# Altium PCB NeuroMother_A.PcbDoc (part 2 of 3)
Units mil, origin at the board's own origin, x right, y up, seen from the top; angles counter-clockwise.
Board outline 11995 x 18500 mil, 2 copper layers (Top Layer, Bottom Layer); 186 components, 92 nets, 510 pads, 3972 vias.
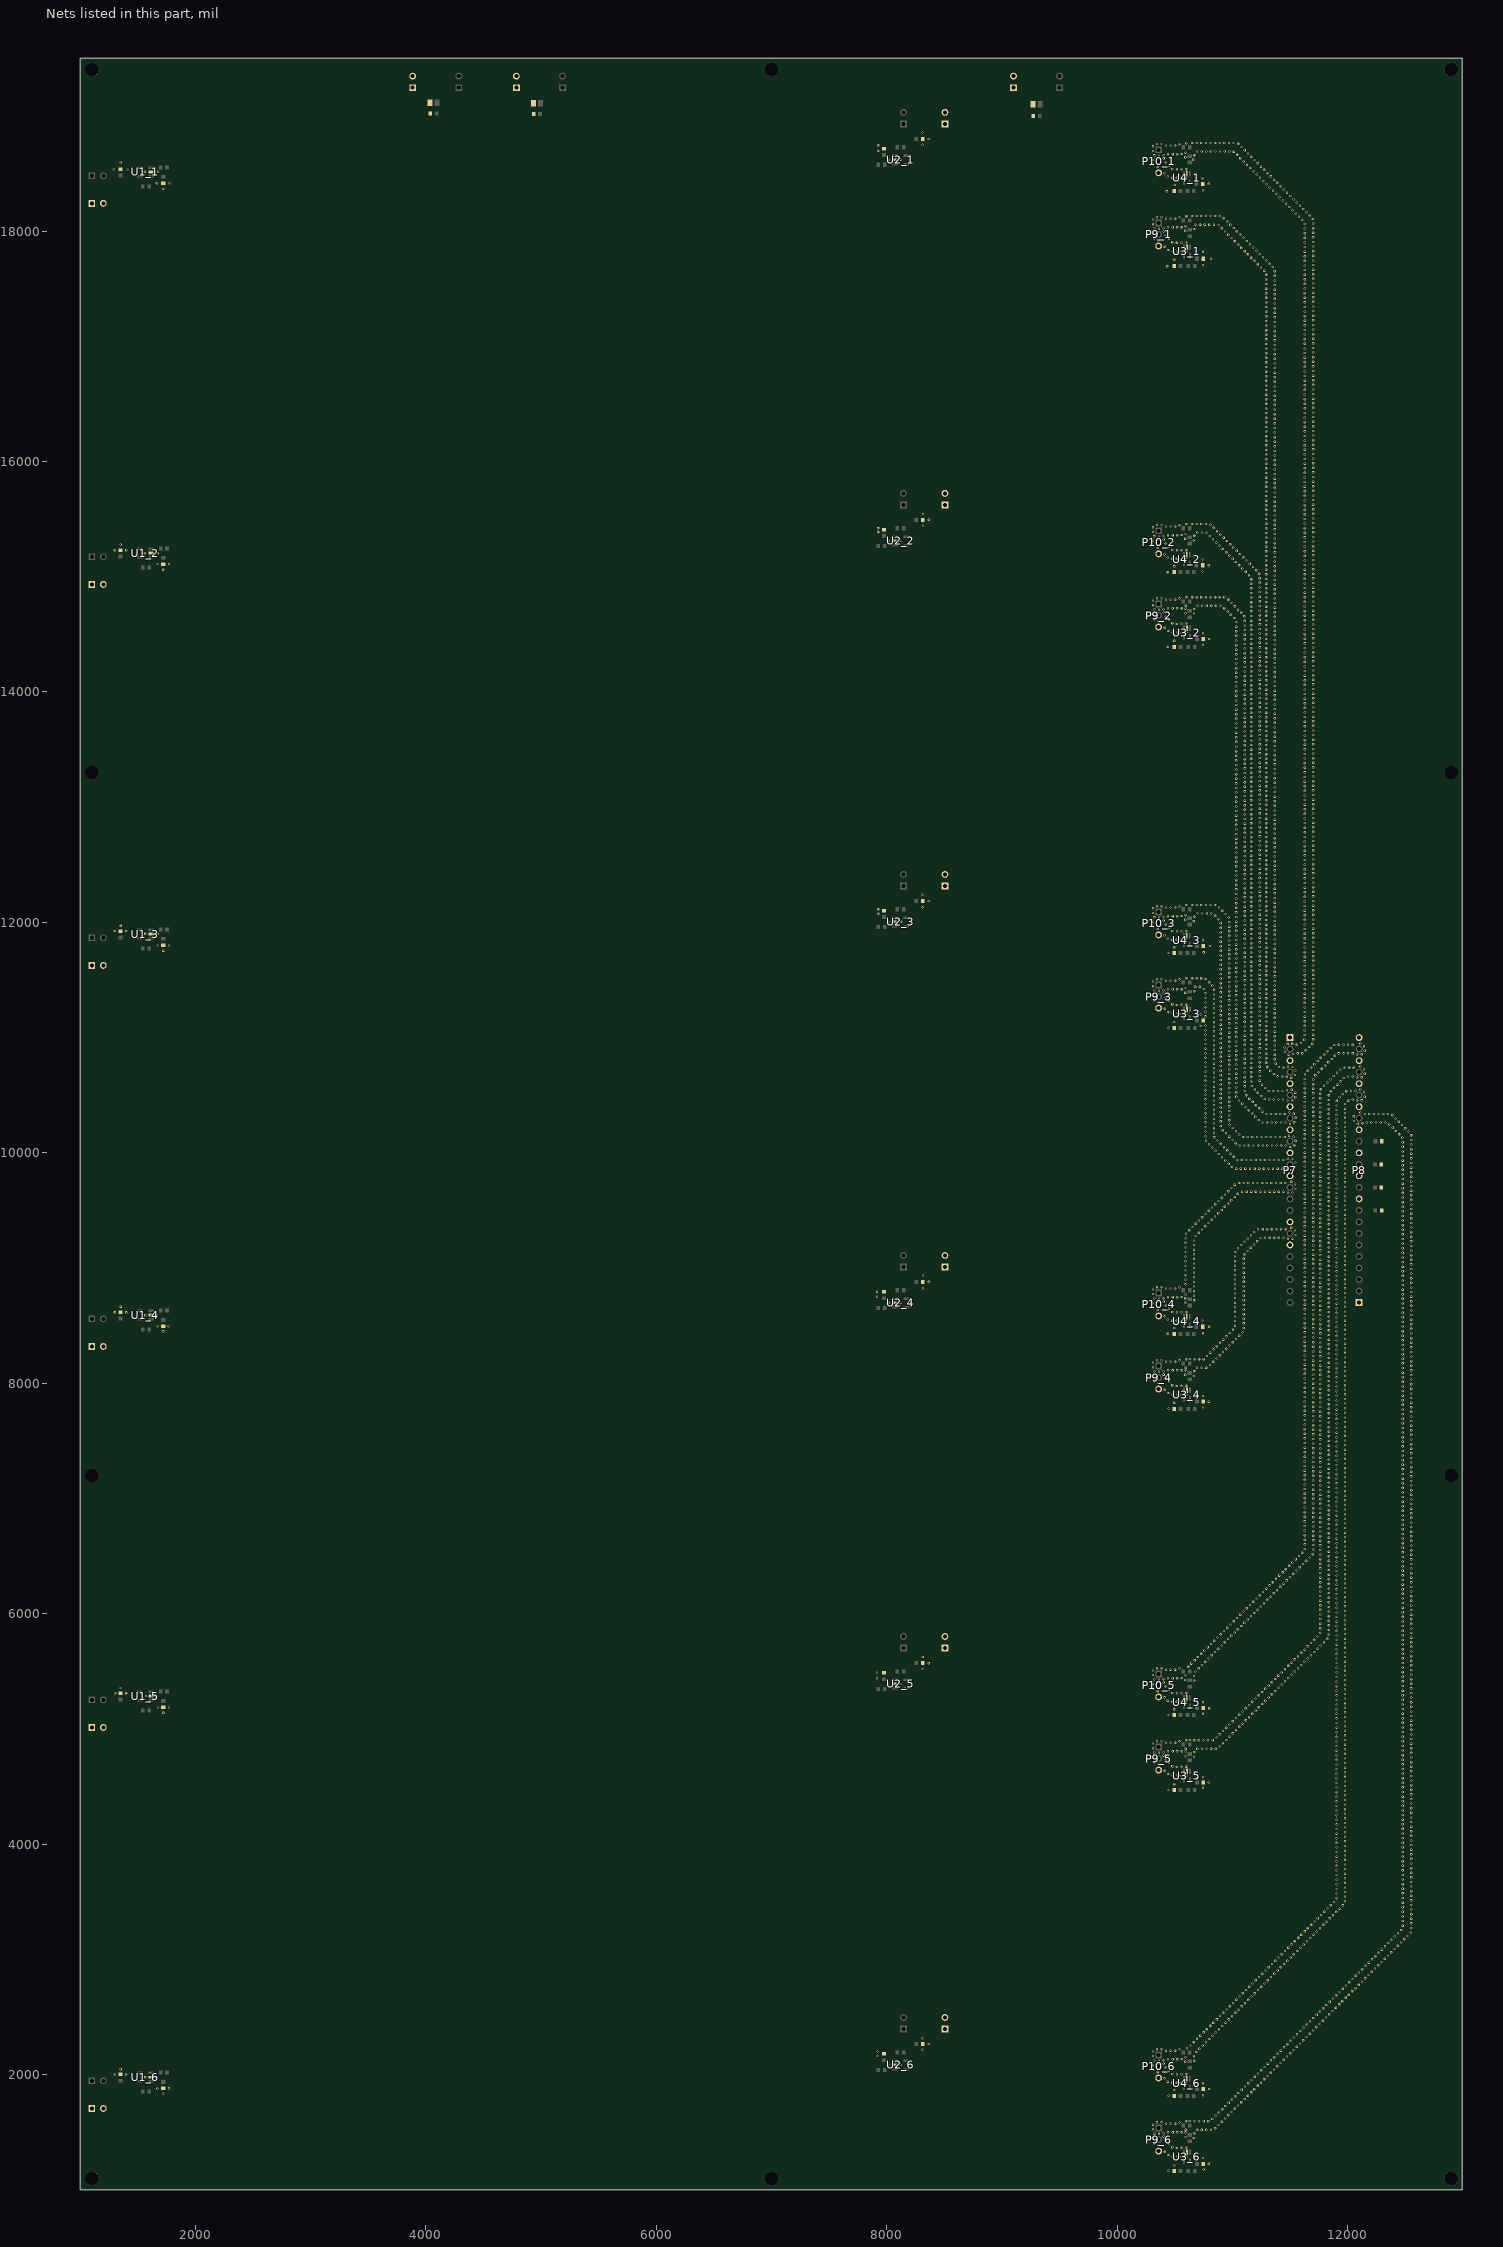
[diagram p2: the nets of this part, all layers, seen from the top]

## Via types
v1: diameter 20, hole 10, Top Layer to Bottom Layer, tented both sides, 3972 vias

## Nets (pads, with @x,y where several pads share a name; then routed paths per layer and width w, separated by ;. In a path a pad name is that pad's centre, name@x,y a point inside that pad or via, vN(x,y) a via of type N, cw(c..) or ccw(c..) an arc to the next point about the centre after c; other vN are vias at no path point) (continued)
GND: (continued)
  other v1: 10445,1165 10750,1175 10495,1210 10795,1225 10745,1275 10559.7,1286.56 10599.69,1286.94 10479.71,1287.78 10519.71,1287.78 10441.81,1300.56 10413.53,1328.84 10518.08,1362.22 10558.07,1363.07 10598.03,1364.88 10478.66,1368.97 10356.64,1385.09 10450.37,1397.26 10321.18,1403.59 10422.09,1425.54 10310.59,1442.17 10665.28,1449.66 10592.15,1458.06 10402.82,1460.59 10362.15,1485.08 10322.19,1486.95 10401.88,1489.67 10668.11,1489.56 10441.05,1497.78 10481.05,1497.78 10521.05,1497.78 10592.78,1498.05 10561.03,1499.03 10594.91,1520.3 10693.65,1520.34 10733.65,1520.34 10773.65,1520.34 10813.65,1520.34 10310.08,1525.07 10851.35,1533.72 10879.63,1562 10310.19,1565.07 10422.85,1572.22 10462.85,1572.22 10502.85,1572.22 10541.02,1584.17 10344.92,1584.92 10384.92,1584.92 10907.92,1590.29 10598.43,1594.12 10670.29,1594.77 10710.29,1594.77 10750.29,1594.77 10790.29,1594.77 10630.3,1595.67 10825.72,1613.35 10936.2,1618.57 10854,1641.63 10964.48,1646.85 10882.29,1669.92 10992.77,1675.14 10910.57,1698.2 11021.05,1703.42 10938.85,1726.49 11049.34,1731.71 10967.14,1754.77 11077.62,1759.99 10995.42,1783.05 11105.91,1788.28 11023.71,1811.34 10445,1815 11134.19,1816.56 10745,1820 1720,1835 11051.99,1839.62 11162.47,1844.84 10495,1865 11080.28,1867.91 11190.76,1873.13 10800,1875 1668.81,1877.99 1770,1880 11108.56,1896.19 11219.04,1901.41 10597.91,1923.94 11136.84,1924.48 10557.93,1925.14 10745,1925 10478.02,1927.78 10518.02,1927.78 11247.33,1929.7 10439.4,1938.21 11165.13,1952.76 11275.61,1957.98 10411,1966.37 1565,1975 1665,1975 11193.41,1981.04 11303.9,1986.27 1300,2000 1400,2000 10518.62,2002.22 10558.62,2002.22 10598.62,2001.89 10478.66,2003.97 11221.7,2009.33 11332.18,2014.55 10352.32,2020.66 10450.37,2032.26 11249.98,2037.61 10318.52,2042.06 11360.46,2042.83 1350,2045 10422.09,2060.54 11278.27,2065.9 11388.75,2071.12 10311.37,2081.41 8015,2085 8120,2085 11306.55,2094.18 10402.82,2095.59 11417.03,2099.4 10591.89,2110.21 10362.15,2120.08 10668.11,2119.76 10322.19,2121.95 11334.83,2122.47 10401.88,2124.67 11445.32,2127.69 10441.05,2132.78 10481.05,2132.78 10521.05,2132.78 10561.03,2134.03 10592.78,2150.2 11363.12,2150.75 11473.6,2155.97 7920,2160 10310.08,2160.07 10667.22,2159.75 11391.4,2179.03 11501.89,2184.26 10685.13,2195.52 7920,2200 10310.19,2200.07 10422.85,2207.22 10462.85,2207.22 10502.85,2207.22 11419.69,2207.32 11530.17,2212.54 8310,2215 10541.02,2219.17 10344.92,2219.92 10384.92,2219.92 10713.41,2223.8 10605.14,2228.24 11447.97,2235.6 11558.45,2240.82 10741.69,2252.09 10636.9,2252.56 11476.26,2263.89 8365,2265 11586.74,2269.11 10769.98,2280.37 10665.19,2280.84 11504.54,2292.17 11615.02,2297.39 10693.47,2309.13 10798.26,2308.66 8310,2315 11532.82,2320.45 11643.31,2325.68 10721.76,2337.41 10826.55,2336.94 11561.11,2348.74 11671.59,2353.96 10854.83,2365.23 10750.04,2365.7 11589.39,2377.02 11699.88,2382.25 10778.33,2393.98 10883.12,2393.51 11617.68,2405.31 11728.16,2410.53 10806.61,2422.26 10911.4,2421.79 11645.96,2433.59 11756.44,2438.81 10939.68,2450.08 10834.89,2450.55 11674.25,2461.88 11784.73,2467.1 10967.97,2478.36 10863.18,2478.83 11702.53,2490.16 11813.01,2495.38 10891.46,2507.12 10996.25,2506.65 11730.81,2518.44 11841.3,2523.67 10919.75,2535.4 11024.54,2534.93 11759.1,2546.73 11869.58,2551.95 11052.82,2563.22 10948.03,2563.68 11787.38,2575.01 11897.87,2580.24 11081.11,2591.5 10976.32,2591.97 11815.67,2603.3 11926.15,2608.52 11004.6,2620.25 11109.39,2619.78 11843.95,2631.58 11954.43,2636.8 11137.67,2648.07 11032.88,2648.54 11872.24,2659.87 11982.72,2665.09 11165.96,2676.35 11061.17,2676.82 11900.52,2688.15 12011,2693.37 11089.45,2705.11 11194.24,2704.64 11928.8,2716.43 12039.29,2721.66 11117.74,2733.39 11222.53,2732.92 11957.09,2744.72 12067.57,2749.94 11250.81,2761.21 11146.02,2761.67 11985.37,2773 12095.86,2778.23 11279.1,2789.49 11174.31,2789.96 12013.66,2801.29 12124.14,2806.51 11202.59,2818.24 11307.38,2817.77 12041.94,2829.57 12152.42,2834.79 11335.66,2846.06 11230.87,2846.53 12070.23,2857.86 12180.71,2863.08 11363.95,2874.34 11259.16,2874.81 12098.51,2886.14 12208.99,2891.36 11287.44,2903.1 11392.23,2902.63 12126.79,2914.42 12237.28,2919.65 11315.73,2931.38 11420.52,2930.91 12155.08,2942.71 12265.56,2947.93 11448.8,2959.2 11344.01,2959.66 12183.36,2970.99 12293.85,2976.22 11477.09,2987.48 11372.3,2987.95 12211.65,2999.28 12322.13,3004.5 11400.58,3016.23 11505.37,3015.76 12239.93,3027.56 12350.41,3032.78 11533.65,3044.05 11428.86,3044.52 12268.22,3055.85 12378.7,3061.07 11561.94,3072.33 11457.15,3072.8 12296.5,3084.13 12406.98,3089.35 11485.43,3101.09 11590.22,3100.62 12324.78,3112.41 12435.27,3117.64 11513.72,3129.37 11618.51,3128.9 12353.07,3140.7 12463.55,3145.92 11646.79,3157.18 11542,3157.65 12381.35,3168.98 12491.84,3174.2 11675.08,3185.47 11570.29,3185.94 12409.64,3197.27 12520.12,3202.49 11598.57,3214.22 11703.36,3213.75 12437.92,3225.55 12547.26,3231.87 11731.64,3242.04 11626.85,3242.51 12466.21,3253.84 11759.93,3270.32 11655.14,3270.79 12552.22,3271.57 12477.78,3292.12 11683.42,3299.08 11788.21,3298.61 12552.22,3311.57 11711.71,3327.36 11816.5,3326.89 12477.78,3332.12 12552.22,3351.57 11844.78,3355.17 11739.99,3355.64 12477.78,3372.12 11873.07,3383.46 11768.28,3383.93 12552.22,3391.57 11796.56,3412.21 11901.35,3411.74 12477.78,3412.12 12552.22,3431.57 11824.84,3440.5 11929.63,3440.03 12477.78,3452.12 11957.92,3468.31 11853.13,3468.78 12552.22,3471.57 12477.78,3492.12 11881.41,3497.07 11977.22,3503.35 12552.22,3511.57 11902.78,3530.88 12477.78,3532.12 11977.22,3543.35 12552.22,3551.57 11902.78,3570.88 12477.78,3572.12 11977.22,3583.35 12552.22,3591.57 11902.78,3610.88 12477.78,3612.12 11977.22,3623.35 12552.22,3631.57 11902.78,3650.88 12477.78,3652.12 11977.22,3663.35 12552.22,3671.57 11902.78,3690.88 12477.78,3692.12 11977.22,3703.35 12552.22,3711.57 11902.78,3730.88 12477.78,3732.12 11977.22,3743.35 12552.22,3751.57 11902.78,3770.88 12477.78,3772.12 11977.22,3783.35 12552.22,3791.57 11902.78,3810.88 12477.78,3812.12 11977.22,3823.35 12552.22,3831.57 11902.78,3850.88 12477.78,3852.12 11977.22,3863.35 12552.22,3871.57 11902.78,3890.88 12477.78,3892.12 11977.22,3903.35 12552.22,3911.57 11902.78,3930.88 12477.78,3932.12 11977.22,3943.35 12552.22,3951.57 11902.78,3970.88 12477.78,3972.12 11977.22,3983.35 12552.22,3991.57 11902.78,4010.88 12477.78,4012.12 11977.22,4023.35 12552.22,4031.57 11902.78,4050.88 12477.78,4052.12 11977.22,4063.35 12552.22,4071.57 11902.78,4090.88 12477.78,4092.12 11977.22,4103.35 12552.22,4111.57 11902.78,4130.88 12477.78,4132.12 11977.22,4143.35 12552.22,4151.57 11902.78,4170.88 12477.78,4172.12 11977.22,4183.35 12552.22,4191.57 11902.78,4210.88 12477.78,4212.12 11977.22,4223.35 12552.22,4231.57 11902.78,4250.88 12477.78,4252.12 11977.22,4263.35 12552.22,4271.57 11902.78,4290.88 12477.78,4292.12 11977.22,4303.35 12552.22,4311.57 11902.78,4330.88 12477.78,4332.12 11977.22,4343.35 12552.22,4351.57 11902.78,4370.88 12477.78,4372.12 11977.22,4383.35 12552.22,4391.57 11902.78,4410.88 12477.78,4412.12 11977.22,4423.35 12552.22,4431.57 11902.78,4450.88 12477.78,4452.12 11977.22,4463.35 10445,4470 12552.22,4471.57 10745,4490 11902.78,4490.88 12477.78,4492.12 11977.22,4503.35 12552.22,4511.57 10495,4520 11902.78,4530.88 12477.78,4532.12 10795,4535 11977.22,4543.35 12552.22,4551.57 11902.78,4570.88 12477.78,4572.12 10745,4580 11977.22,4583.35 12552.22,4591.57 10559.7,4593.66 10599.69,4594.04 10479.71,4594.88 10519.71,4594.88 10441.81,4607.66 11902.78,4610.88 12477.78,4612.12 11977.22,4623.35 12552.22,4631.57 10413.53,4635.94 11902.78,4650.88 12477.78,4652.12 11977.22,4663.35 10518.08,4669.32 10558.07,4670.17 10598.03,4671.98 12552.22,4671.57 10478.66,4676.07 11902.78,4690.88 10356.64,4692.19 12477.78,4692.12 11977.22,4703.35 10450.37,4704.36 10321.18,4710.69 12552.22,4711.57 11902.78,4730.88 12477.78,4732.12 10422.09,4732.64 11977.22,4743.35 10310.59,4749.27 12552.22,4751.57 10666.42,4758.46 10592.62,4762.83 10402.82,4767.69 11902.78,4770.88 12477.78,4772.12 11977.22,4783.35 10362.15,4792.18 12552.22,4791.57 10322.19,4794.05 10401.88,4796.77 10668.02,4798.43 10592.78,4802.83 10441.05,4804.88 10481.05,4804.88 10521.05,4804.88 10561.03,4806.13 11902.78,4810.88 12477.78,4812.12 11977.22,4823.35 10594.91,4827.4 10695.55,4827.44 10735.55,4827.44 10775.55,4827.44 10815.55,4827.44 10855.55,4827.62 10310.08,4832.17 12552.22,4831.57 10890.21,4847.58 11902.78,4850.88 12477.78,4852.12 11977.22,4863.35 10310.19,4872.17 12552.22,4871.57 10918.5,4875.87 10422.85,4879.32 10462.85,4879.32 10502.85,4879.32 10541.02,4891.27 11902.78,4890.88 10344.92,4892.02 10384.92,4892.02 12477.78,4892.12 10598.43,4901.22 10668.61,4901.87 10708.61,4901.87 10748.61,4901.87 10788.61,4901.87 10828.61,4901.87 10628.62,4902.77 11977.22,4903.35 10946.78,4904.15 12552.22,4911.57 10861.71,4924.34 11902.78,4930.88 10975.07,4932.44 12477.78,4932.12 11977.22,4943.35 12552.22,4951.57 10889.99,4952.62 11003.35,4960.72 11902.78,4970.88 12477.78,4972.12 10918.27,4980.9 11977.22,4983.35 11031.64,4989 12552.22,4991.57 10946.56,5009.19 11902.78,5010.88 12477.78,5012.12 11059.92,5017.29 11977.22,5023.35 12552.22,5031.57 10974.84,5037.47 11088.2,5045.57 11902.78,5050.88 12477.78,5052.12 11977.22,5063.35 11003.13,5065.76 12552.22,5071.57 11116.49,5073.86 11902.78,5090.88 12477.78,5092.12 11031.41,5094.04 11144.77,5102.14 11977.22,5103.35 12552.22,5111.57 10445,5120 11059.69,5122.33 10745,5130 11173.06,5130.43 11902.78,5130.88 12477.78,5132.12 1720,5140 11977.22,5143.35 11087.98,5150.61 12552.22,5151.57 11201.34,5158.71 10495,5170 11902.78,5170.88 12477.78,5172.12 11116.26,5178.89 10800,5180 11977.22,5183.35 1675,5185 1770,5185 11229.62,5186.99 12552.22,5191.57 11144.55,5207.18 11902.78,5210.88 12477.78,5212.12 11257.91,5215.28 11977.22,5223.35 10745,5230 10597.91,5231.04 10557.93,5232.24 12552.22,5231.57 10478.02,5234.88 10518.02,5234.88 11172.83,5235.46 11286.19,5243.56 10439.4,5245.31 11902.78,5250.88 12477.78,5252.12 11977.22,5263.35 11201.12,5263.75 11314.48,5271.85 12552.22,5271.57 10411,5273.47 1570,5285 1665,5285 11902.78,5290.88 11229.4,5292.03 12477.78,5292.12 11342.76,5300.13 11977.22,5303.35 10518.62,5309.32 10558.62,5309.32 10598.62,5308.99 1305,5310 1400,5310 10478.66,5311.07 12552.22,5311.57 11257.68,5320.31 10352.32,5327.76 11371.05,5328.42 11902.78,5330.88 12477.78,5332.12 10450.37,5339.36 11977.22,5343.35 10318.52,5349.16 11285.97,5348.6 12552.22,5351.57 1348.31,5355.17 11399.33,5356.7 10422.09,5367.64 11902.78,5370.88 12477.78,5372.12 11314.25,5376.88 11977.22,5383.35 11427.61,5384.98 10311.37,5388.51 8015,5390 8120,5390 12552.22,5391.57 10402.82,5402.69 11342.54,5405.17 11902.78,5410.88 12477.78,5412.12 11455.9,5413.27 10668.11,5419.23 11977.22,5423.35 10591.89,5424.9 10362.15,5427.18 10322.19,5429.05 10401.88,5431.77 12552.22,5431.57 11370.82,5433.45 7915,5440 10441.05,5439.88 10481.05,5439.88 10521.05,5439.88 10561.03,5441.13 11484.18,5441.55 11902.78,5450.88 12477.78,5452.12 10667.22,5459.22 11399.11,5461.74 11977.22,5463.35 10592.78,5464.89 10310.08,5467.17 11512.47,5469.84 12552.22,5471.57 7915,5490 11427.39,5490.02 11902.78,5490.88 12477.78,5492.12 10679.72,5497.21 11540.75,5498.12 11977.22,5503.35 10310.19,5507.17 12552.22,5511.57 10422.85,5514.32 10462.85,5514.32 10502.85,5514.32 11455.67,5518.3 8310,5520 10708.01,5525.5 10541.02,5526.27 11569.04,5526.41 10344.92,5527.02 10384.92,5527.02 11902.78,5530.88 12477.78,5532.12 10615.46,5538.21 11977.22,5543.35 11483.96,5546.59 12552.22,5551.57 10736.29,5553.78 11597.32,5554.69 10643.74,5566.5 8365,5570 11902.78,5570.88 12477.78,5572.12 11512.24,5574.87 10764.57,5582.07 11625.6,5582.97 11977.22,5583.35 12552.22,5591.57 10672.03,5594.78 11540.53,5603.16 10792.86,5610.35 11653.89,5611.26 11902.78,5610.88 12477.78,5612.12 10700.31,5623.06 11977.22,5623.35 8311.55,5623.96 11568.81,5631.44 12552.22,5631.57 10821.14,5638.64 11682.17,5639.54 10728.6,5651.35 11902.78,5650.88 12477.78,5652.12 11597.1,5659.73 11977.22,5663.35 10849.43,5666.92 11710.46,5667.83 12552.22,5671.57 10756.88,5679.63 11625.38,5688.01 11902.78,5690.88 12477.78,5692.12 10877.71,5695.2 11738.74,5696.11 11977.22,5703.35 10785.16,5707.92 12552.22,5711.57 11653.66,5716.29 10906,5723.49 11767.03,5724.4 11902.78,5730.88 12477.78,5732.12 10813.45,5736.2 11977.22,5743.35 11681.95,5744.58 10934.28,5751.77 12552.22,5751.57 11795.31,5752.68 10841.73,5764.49 11902.78,5770.88 12477.78,5772.12 11710.23,5772.86 10962.56,5780.06 11823.59,5780.96 11977.22,5783.35 12552.22,5791.57 10870.02,5792.77 11738.52,5801.15 10990.85,5808.34 11902.78,5810.88 12477.78,5812.12 11837.22,5818.57 10898.3,5821.05 11977.22,5823.35 12552.22,5831.57 11762.78,5832.95 11019.13,5836.63 10926.59,5849.34 11902.78,5850.88 12477.78,5852.12 11837.22,5858.57 11977.22,5863.35 11047.42,5864.91 12552.22,5871.57 11762.78,5872.95 10954.87,5877.62 11902.78,5890.88 12477.78,5892.12 11075.7,5893.19 11837.22,5898.57 11977.22,5903.35 10983.15,5905.91 12552.22,5911.57 11762.78,5912.95 11103.99,5921.48 11902.78,5930.88 12477.78,5932.12 11011.44,5934.19 11837.22,5938.57 11977.22,5943.35 11132.27,5949.76 12552.22,5951.57 11762.78,5952.95 11039.72,5962.48 11902.78,5970.88 12477.78,5972.12 11160.55,5978.05 11837.22,5978.57 11977.22,5983.35 11068.01,5990.76 12552.22,5991.57 11762.78,5992.95 11188.84,6006.33 11902.78,6010.88 12477.78,6012.12 11096.29,6019.04 11837.22,6018.57 11977.22,6023.35 12552.22,6031.57 11762.78,6032.95 11217.12,6034.62 11124.58,6047.33 11902.78,6050.88 12477.78,6052.12 11837.22,6058.57 11245.41,6062.9 11977.22,6063.35 12552.22,6071.57 11762.78,6072.95 11152.86,6075.61 11273.69,6091.18 11902.78,6090.88 12477.78,6092.12 11837.22,6098.57 11977.22,6103.35 11181.14,6103.9 12552.22,6111.57 11762.78,6112.95 11301.98,6119.47 11902.78,6130.88 11209.43,6132.18 12477.78,6132.12 11837.22,6138.57 11977.22,6143.35 11330.26,6147.75 12552.22,6151.57 11762.78,6152.95 11237.71,6160.47 11902.78,6170.88 12477.78,6172.12 11358.54,6176.04 11837.22,6178.57 11977.22,6183.35 11266,6188.75 12552.22,6191.57 11762.78,6192.95 11386.83,6204.32 11902.78,6210.88 12477.78,6212.12 11294.28,6217.03 11837.22,6218.57 11977.22,6223.35 12552.22,6231.57 11415.11,6232.61 11762.78,6232.95 11322.56,6245.32 11902.78,6250.88 12477.78,6252.12 11837.22,6258.57 11443.4,6260.89 11977.22,6263.35 12552.22,6271.57 11762.78,6272.95 11350.85,6273.6 11471.68,6289.17 11902.78,6290.88 12477.78,6292.12 11837.22,6298.57 11379.13,6301.89 11977.22,6303.35 12552.22,6311.57 11762.78,6312.95 11499.97,6317.46 11407.42,6330.17 11902.78,6330.88 12477.78,6332.12 11837.22,6338.57 11977.22,6343.35 11528.25,6345.74 12552.22,6351.57 11762.78,6352.95 11435.7,6358.46 11902.78,6370.88 12477.78,6372.12 11556.53,6374.03 11837.22,6378.57 11977.22,6383.35 11463.99,6386.74 12552.22,6391.57 11762.78,6392.95 11584.82,6402.31 11902.78,6410.88 12477.78,6412.12 11492.27,6415.02 11837.22,6418.57 11977.22,6423.35 11613.1,6430.6 12552.22,6431.57 11762.78,6432.95 11520.55,6443.31 11902.78,6450.88 12477.78,6452.12 11641.39,6458.88 11837.22,6458.57 11977.22,6463.35 11548.84,6471.59 12552.22,6471.57 11762.78,6472.95 11669.67,6487.16 11902.78,6490.88 12477.78,6492.12 11837.22,6498.57 11577.12,6499.88 11977.22,6503.35 12552.22,6511.57 11762.78,6512.95 11696.9,6516.46 11605.41,6528.16 11902.78,6530.88 12477.78,6532.12 11837.22,6538.57 11977.22,6543.35 12552.22,6551.57 11762.78,6552.95 11702.22,6556.11 11627.78,6561.32 11902.78,6570.88 12477.78,6572.12 11837.22,6578.57 11977.22,6583.35 12552.22,6591.57 11762.78,6592.95 11702.22,6596.11 11627.78,6601.32 11902.78,6610.88 12477.78,6612.12 11837.22,6618.57 11977.22,6623.35 12552.22,6631.57 11762.78,6632.95 11702.22,6636.11 11627.78,6641.32 11902.78,6650.88 12477.78,6652.12 11837.22,6658.57 11977.22,6663.35 12552.22,6671.57 11762.78,6672.95 11702.22,6676.11 11627.78,6681.32 11902.78,6690.88 12477.78,6692.12 11837.22,6698.57 11977.22,6703.35 12552.22,6711.57 11762.78,6712.95 11702.22,6716.11 11627.78,6721.32 11902.78,6730.88 12477.78,6732.12 11837.22,6738.57 11977.22,6743.35 12552.22,6751.57 11762.78,6752.95 11702.22,6756.11 11627.78,6761.32 11902.78,6770.88 12477.78,6772.12 11837.22,6778.57 11977.22,6783.35 12552.22,6791.57 11762.78,6792.95 11702.22,6796.11 11627.78,6801.32 11902.78,6810.88 12477.78,6812.12 11837.22,6818.57 11977.22,6823.35 12552.22,6831.57 11762.78,6832.95 11702.22,6836.11 11627.78,6841.32 11902.78,6850.88 12477.78,6852.12 11837.22,6858.57 11977.22,6863.35 12552.22,6871.57 11762.78,6872.95 11702.22,6876.11 11627.78,6881.32 11902.78,6890.88 12477.78,6892.12 11837.22,6898.57 11977.22,6903.35 12552.22,6911.57 11762.78,6912.95 11702.22,6916.11 11627.78,6921.32 11902.78,6930.88 12477.78,6932.12 11837.22,6938.57 11977.22,6943.35 12552.22,6951.57 11762.78,6952.95 11702.22,6956.11 11627.78,6961.32 11902.78,6970.88 12477.78,6972.12 11837.22,6978.57 11977.22,6983.35 12552.22,6991.57 11762.78,6992.95 11702.22,6996.11 11627.78,7001.32 11902.78,7010.88 12477.78,7012.12 11837.22,7018.57 11977.22,7023.35 12552.22,7031.57 11762.78,7032.95 11702.22,7036.11 11627.78,7041.32 11902.78,7050.88 12477.78,7052.12 11837.22,7058.57 11977.22,7063.35 12552.22,7071.57 11762.78,7072.95 11702.22,7076.11 11627.78,7081.32 11902.78,7090.88 12477.78,7092.12 11837.22,7098.57 11977.22,7103.35 12552.22,7111.57 11762.78,7112.95 11702.22,7116.11 11627.78,7121.32 11902.78,7130.88 12477.78,7132.12 11837.22,7138.57 11977.22,7143.35 12552.22,7151.57 11762.78,7152.95 11702.22,7156.11 11627.78,7161.32 11902.78,7170.88 12477.78,7172.12 11837.22,7178.57 11977.22,7183.35 12552.22,7191.57 11762.78,7192.95 11702.22,7196.11 11627.78,7201.32 11902.78,7210.88 12477.78,7212.12 11837.22,7218.57 11977.22,7223.35 12552.22,7231.57 11762.78,7232.95 11702.22,7236.11 11627.78,7241.32 11902.78,7250.88 12477.78,7252.12 11837.22,7258.57 11977.22,7263.35 12552.22,7271.57 11762.78,7272.95 11702.22,7276.11 11627.78,7281.32 11902.78,7290.88 12477.78,7292.12 11837.22,7298.57 11977.22,7303.35 12552.22,7311.57 11762.78,7312.95 11702.22,7316.11 11627.78,7321.32 11902.78,7330.88 12477.78,7332.12 11837.22,7338.57 11977.22,7343.35 12552.22,7351.57 11762.78,7352.95 11702.22,7356.11 11627.78,7361.32 11902.78,7370.88 12477.78,7372.12 11837.22,7378.57 11977.22,7383.35 12552.22,7391.57 11762.78,7392.95 11702.22,7396.11 11627.78,7401.32 11902.78,7410.88 12477.78,7412.12 11837.22,7418.57 11977.22,7423.35 12552.22,7431.57 11762.78,7432.95 11702.22,7436.11 11627.78,7441.32 11902.78,7450.88 12477.78,7452.12 11837.22,7458.57 11977.22,7463.35 12552.22,7471.57 11762.78,7472.95 11702.22,7476.11 11627.78,7481.32 11902.78,7490.88 12477.78,7492.12 11837.22,7498.57 11977.22,7503.35 12552.22,7511.57 11762.78,7512.95 11702.22,7516.11 11627.78,7521.32 11902.78,7530.88 12477.78,7532.12 11837.22,7538.57 11977.22,7543.35 12552.22,7551.57 11762.78,7552.95 11702.22,7556.11 11627.78,7561.32 11902.78,7570.88 12477.78,7572.12 11837.22,7578.57 11977.22,7583.35 12552.22,7591.57 11762.78,7592.95 11702.22,7596.11 11627.78,7601.32 11902.78,7610.88 12477.78,7612.12 11837.22,7618.57 11977.22,7623.35 12552.22,7631.57 11762.78,7632.95 11702.22,7636.11 11627.78,7641.32 11902.78,7650.88 12477.78,7652.12 11837.22,7658.57 11977.22,7663.35 12552.22,7671.57 11762.78,7672.95 11702.22,7676.11 11627.78,7681.32 11902.78,7690.88 12477.78,7692.12 11837.22,7698.57 11977.22,7703.35 12552.22,7711.57 11762.78,7712.95 11702.22,7716.11 11627.78,7721.32 11902.78,7730.88 12477.78,7732.12 11837.22,7738.57 11977.22,7743.35 12552.22,7751.57 11762.78,7752.95 11702.22,7756.11 11627.78,7761.32 11902.78,7770.88 12477.78,7772.12 11837.22,7778.57 10445,7780 11977.22,7783.35 10745,7790 12552.22,7791.57 11762.78,7792.95 11702.22,7796.11 11627.78,7801.32 11902.78,7810.88 12477.78,7812.12 11837.22,7818.57 11977.22,7823.35 10495,7830 12552.22,7831.57 11762.78,7832.95 11702.22,7836.11 10795,7840 11627.78,7841.32 11902.78,7850.88 12477.78,7852.12 11837.22,7858.57 11977.22,7863.35 12552.22,7871.57 11762.78,7872.95 11702.22,7876.11 11627.78,7881.32 10745,7890 11902.78,7890.88 12477.78,7892.12 11837.22,7898.57 10559.7,7900.76 10599.69,7901.14 10479.71,7901.98 10519.71,7901.98 11977.22,7903.35 12552.22,7911.57 11762.78,7912.95 10441.81,7914.76 11702.22,7916.11 11627.78,7921.32 11902.78,7930.88 12477.78,7932.12 11837.22,7938.57 10413.53,7943.04 11977.22,7943.35 12552.22,7951.57 11762.78,7952.95 11702.22,7956.11 11627.78,7961.32 11902.78,7970.88 12477.78,7972.12 10518.08,7976.42 10558.07,7977.27 10598.03,7979.08 11837.22,7978.57 10478.66,7983.17 11977.22,7983.35 12552.22,7991.57 11762.78,7992.95 11702.22,7996.11 10356.64,7999.29 11627.78,8001.32 10450.37,8011.46 11902.78,8010.88 12477.78,8012.12 10321.18,8017.79 11837.22,8018.57 11977.22,8023.35 12552.22,8031.57 11762.78,8032.95 11702.22,8036.11 10422.09,8039.74 11627.78,8041.32 11902.78,8050.88 12477.78,8052.12 10310.59,8056.37 11837.22,8058.57 10664.59,8062.83 11977.22,8063.35 12552.22,8071.57 11762.78,8072.95 10591.9,8073.51 10402.82,8074.79 11702.22,8076.11 11627.78,8081.32 11902.78,8090.88 12477.78,8092.12 10362.15,8099.28 11837.22,8098.57 10322.19,8101.15 10668.11,8102.68 11977.22,8103.35 10401.88,8103.87 10441.05,8111.98 10481.05,8111.98 10521.05,8111.98 12552.22,8111.57 10561.03,8113.23 10592.78,8113.5 11762.78,8112.95 11702.22,8116.11 11627.78,8121.32 11902.78,8130.88 12477.78,8132.12 10594.91,8134.5 10692.28,8134.54 10732.28,8134.54 10772.28,8135.24 10310.08,8139.27 11837.22,8138.57 11977.22,8143.35 12552.22,8151.57 11762.78,8152.95 11702.22,8156.11 10805.36,8157.73 11627.78,8161.32 11902.78,8170.88 12477.78,8172.12 10310.19,8179.27 11837.22,8178.57 11977.22,8183.35 10422.85,8186.42 10462.85,8186.42 10502.85,8186.42 10833.64,8186.01 12552.22,8191.57 11762.78,8192.95 11702.22,8196.11 10541.02,8198.37 10344.92,8199.12 10384.92,8199.12 11627.78,8201.32 10598.43,8208.32 10671.12,8208.97 10711.12,8208.97 10751.12,8208.97 10631.13,8209.87 11902.78,8210.88 12477.78,8212.12 10861.93,8214.3 11837.22,8218.57 11977.22,8223.35 12552.22,8231.57 11762.78,8232.95 11702.22,8236.11 10779.52,8237.15 11627.78,8241.32 10890.21,8242.58 11902.78,8250.88 12477.78,8252.12 11837.22,8258.57 11977.22,8263.35 10807.8,8265.43 10918.5,8270.87 12552.22,8271.57 11762.78,8272.95 11702.22,8276.11 11627.78,8281.32 11902.78,8290.88 12477.78,8292.12 10836.08,8293.71 10946.78,8299.15 11837.22,8298.57 11977.22,8303.35 12552.22,8311.57 11762.78,8312.95 11702.22,8316.11 11627.78,8321.32 10864.37,8322 10975.06,8327.43 11902.78,8330.88 12477.78,8332.12 11837.22,8338.57 11977.22,8343.35 10892.65,8350.28 12552.22,8351.57 11762.78,8352.95 11003.35,8355.72 11702.22,8356.11 11627.78,8361.32 11902.78,8370.88 12477.78,8372.12 10920.94,8378.57 11837.22,8378.57 11977.22,8383.35 11031.63,8384 12552.22,8391.57 11762.78,8392.95 11702.22,8396.11 11627.78,8401.32 10949.22,8406.85 11902.78,8410.88 11059.92,8412.29 12477.78,8412.12 11837.22,8418.57 11977.22,8423.35 10440,8430 12552.22,8431.57 11762.78,8432.95 10745,8435 10977.51,8435.14 11702.22,8436.11 11087.92,8440.85 11627.78,8441.32 1720,8450 11902.78,8450.88 12477.78,8452.12 11837.22,8458.57 11005.79,8463.42 11977.22,8463.35 12552.22,8471.57 11762.78,8472.95 11702.22,8476.11 10495,8480 11097.22,8479.75 11627.78,8481.32 10800,8490 11902.78,8490.88 12477.78,8492.12 1670,8495 1765,8495 11837.22,8498.57 11022.78,8499.63 11977.22,8503.35 12552.22,8511.57 11762.78,8512.95 11702.22,8516.11 11097.22,8519.75 11627.78,8521.32 11902.78,8530.88 12477.78,8532.12 10597.91,8538.14 10557.93,8539.34 11837.22,8538.57 11022.78,8539.63 10478.02,8541.98 10518.02,8541.98 11977.22,8543.35 10740,8545 10439.4,8552.41 12552.22,8551.57 11762.78,8552.95 11702.22,8556.11 11097.22,8559.75 11627.78,8561.32 11902.78,8570.88 12477.78,8572.12 11837.22,8578.57 11022.78,8579.63 10411,8580.57 11977.22,8583.35 1565,8590 1665,8590 12552.22,8591.57 11762.78,8592.95 11702.22,8596.11 11097.22,8599.75 11627.78,8601.32 11902.78,8610.88 12477.78,8612.12 1300,8615 1400,8615 10518.62,8616.42 10558.62,8616.42 10598.62,8616.09 10478.66,8618.17 11837.22,8618.57 11022.78,8619.63 11977.22,8623.35 12552.22,8631.57 11762.78,8632.95 10352.32,8634.86 11702.22,8636.11 11097.22,8639.75 11627.78,8641.32 10450.37,8646.46 11902.78,8650.88 12477.78,8652.12 10318.52,8656.26 11837.22,8658.57 11022.78,8659.63 11977.22,8663.35 1350,8665 12552.22,8671.57 11762.78,8672.95 10422.09,8674.74 11702.22,8676.11 11097.22,8679.75 11627.78,8681.32 11902.78,8690.88 12477.78,8692.12 8120,8695 10311.37,8695.61 8017.11,8698.44 11837.22,8698.57 10590,8700 11022.78,8699.63 11977.22,8703.35 10402.82,8709.79 12552.22,8711.57 11762.78,8712.95 11702.22,8716.11 10668.11,8719.39 11097.22,8719.75 11627.78,8721.32 11902.78,8730.88 12477.78,8732.12 10362.15,8734.28 10322.19,8736.15 10591.89,8738.34 10401.88,8738.87 11837.22,8738.57 11022.78,8739.63 11977.22,8743.35 10441.05,8746.98 10481.05,8746.98 10521.05,8746.98 10561.03,8748.23 7915,8750 12552.22,8751.57 11762.78,8752.95 11702.22,8756.11 10667.22,8759.38 11097.22,8759.75 11627.78,8761.32 10594.91,8769.5 11902.78,8770.88 12477.78,8772.12 10310.08,8774.27 11837.22,8778.57 11022.78,8779.63 11977.22,8783.35 12552.22,8791.57 11762.78,8792.95 7915,8795 11702.22,8796.11 10667.22,8799.38 11097.22,8799.75 11627.78,8801.32 11902.78,8810.88 12477.78,8812.12 10310.19,8814.27 11837.22,8818.57 11022.78,8819.63 10422.85,8821.42 10462.85,8821.42 10502.85,8821.42 11977.22,8823.35 8315,8825 12552.22,8831.57 10541.02,8833.37 11762.78,8832.95 10344.92,8834.12 10384.92,8834.12 11702.22,8836.11 10667.22,8839.38 11097.22,8839.75 11627.78,8841.32 11902.78,8850.88 12477.78,8852.12 10592.78,8858.33 11837.22,8858.57 11022.78,8859.63 11977.22,8863.35 12552.22,8871.57 11762.78,8872.95 11702.22,8876.11 10667.22,8879.38 8365,8880 11097.22,8879.75 11627.78,8881.32 11902.78,8890.88 12477.78,8892.12 10592.78,8898.33 11837.22,8898.57 11022.78,8899.63 11977.22,8903.35 12552.22,8911.57 11762.78,8912.95 11702.22,8916.11 10667.22,8919.38 11097.22,8919.75 11627.78,8921.32 11902.78,8930.88 12477.78,8932.12 8315,8935 10592.78,8938.33 11837.22,8938.57 11022.78,8939.63 11977.22,8943.35 12552.22,8951.57 11762.78,8952.95 11702.22,8956.11 10667.22,8959.38 11097.22,8959.75 11627.78,8961.32 11902.78,8970.88 12477.78,8972.12 10592.78,8978.33 11837.22,8978.57 11022.78,8979.63 11977.22,8983.35 12552.22,8991.57 11762.78,8992.95 11702.22,8996.11 10667.22,8999.38 11097.22,8999.75 11627.78,9001.32 11902.78,9010.88 12477.78,9012.12 10592.78,9018.33 11837.22,9018.57 11022.78,9019.63 11977.22,9023.35 12552.22,9031.57 11762.78,9032.95 11702.22,9036.11 10667.22,9039.38 11097.22,9039.75 11627.78,9041.32 11902.78,9050.88 12477.78,9052.12 10592.78,9058.33 11837.22,9058.57 11022.78,9059.63 11977.22,9063.35 12552.22,9071.57 11762.78,9072.95 11702.22,9076.11 10667.22,9079.38 11097.22,9079.75 11627.78,9081.32 11902.78,9090.88 12477.78,9092.12 10592.78,9098.33 11837.22,9098.57 11022.78,9099.63 11977.22,9103.35 12552.22,9111.57 11762.78,9112.95 11702.22,9116.11 10667.22,9119.38 11102.09,9119.46 11627.78,9121.32 11902.78,9130.88 12477.78,9132.12 10592.78,9138.33 11837.22,9138.57 11024.3,9139.6 11977.22,9143.35 11130.37,9147.74 12552.22,9151.57 11762.78,9152.95 11702.22,9156.11 10667.22,9159.38 11627.78,9161.32 11048.68,9171.31 11902.78,9170.88 12477.78,9172.12 11158.65,9176.02 10592.78,9178.33 11837.22,9178.57 11977.22,9183.35 12552.22,9191.57 11762.78,9192.95 11702.22,9196.11 10667.22,9199.38 11076.96,9199.59 11627.78,9201.32 11186.94,9204.31 11902.78,9210.88 12477.78,9212.12 10592.78,9218.33 11837.22,9218.57 11977.22,9223.35 11105.25,9227.88 12552.22,9231.57 11215.22,9232.59 11762.78,9232.95 11702.22,9236.11 10667.22,9239.38 11627.78,9241.32 11902.78,9250.88 12477.78,9252.12 11482.32,9253.29 11522.27,9255.19 11133.53,9256.16 10592.78,9258.33 11837.22,9258.57 11243.51,9260.88 11283.46,9262.78 11323.46,9262.78 11363.46,9262.78 11403.46,9262.78 11443.46,9262.78 11977.22,9263.35 12552.22,9271.57 11762.78,9272.95 11702.22,9276.11 10679.94,9277.31 11627.78,9281.32 11161.82,9284.45 11547.89,9285.91 11902.78,9290.88 12477.78,9292.12 10597.68,9298.03 11837.22,9298.57 11977.22,9303.35 10708.22,9305.59 12552.22,9311.57 11190.1,9312.73 11762.78,9312.95 11702.22,9316.11 11627.78,9321.32 11542.82,9325.59 10624.8,9327.43 11902.78,9330.88 12477.78,9332.12 10736.5,9333.87 11222.54,9336.13 11262.53,9337.22 11302.53,9337.22 11342.53,9337.22 11382.53,9337.22 11422.53,9337.22 11462.53,9337.22 11837.22,9338.57 11977.22,9343.35 11510.37,9348.98 12552.22,9351.57 11762.78,9352.95 10653.09,9355.72 11702.22,9356.11 11627.78,9361.32 10764.79,9362.16 11902.78,9370.88 12477.78,9372.12 11837.22,9378.57 11977.22,9383.35 10681.37,9384 10793.07,9390.44 12552.22,9391.57 11762.78,9392.95 11702.22,9396.11 11627.78,9401.32 11902.78,9410.88 10709.65,9412.28 12477.78,9412.12 10821.36,9418.73 11837.22,9418.57 11977.22,9423.35 12552.22,9431.57 11762.78,9432.95 11702.22,9436.11 10737.94,9440.57 11627.78,9441.32 10849.64,9447.01 11902.78,9450.88 12477.78,9452.12 11837.22,9458.57 11977.22,9463.35 10766.22,9468.85 12552.22,9471.57 11762.78,9472.95 10877.93,9475.3 11702.22,9476.11 11627.78,9481.32 11902.78,9490.88 12477.78,9492.12 10794.51,9497.14 11837.22,9498.57 11977.22,9503.35 10906.21,9503.58 12552.22,9511.57 11762.78,9512.95 11702.22,9516.11 11627.78,9521.32 10822.79,9525.42 11902.78,9530.88 10934.49,9531.86 12477.78,9532.12 11837.22,9538.57 11977.22,9543.35 12552.22,9551.57 11762.78,9552.95 10851.08,9553.71 11702.22,9556.11 10962.78,9560.15 11627.78,9561.32 11902.78,9570.88 12477.78,9572.12 11837.22,9578.57 10879.36,9581.99 11977.22,9583.35 10991.06,9588.43 12552.22,9591.57 11762.78,9592.95 11702.22,9596.11 11627.78,9601.32 10907.64,9610.27 11902.78,9610.88 12477.78,9612.12 11019.35,9616.72 11837.22,9618.57 11977.22,9623.35 12552.22,9631.57 11762.78,9632.95 11702.22,9636.11 10935.93,9638.56 11627.78,9641.32 11047.63,9645 11902.78,9650.88 12477.78,9652.12 11482.32,9653.29 11522.27,9655.19 11837.22,9658.57 11083.46,9662.78 11123.46,9662.78 11163.46,9662.78 11203.46,9662.78 11243.46,9662.78 11283.46,9662.78 11323.46,9662.78 11363.46,9662.78 11403.46,9662.78 11443.46,9662.78 11977.22,9663.35 10964.21,9666.84 12552.22,9671.57 11762.78,9672.95 11702.22,9676.11 11627.78,9681.32 11547.89,9685.91 11902.78,9690.88 12477.78,9692.12 10992.5,9695.13 11837.22,9698.57 11977.22,9703.35 12552.22,9711.57 11762.78,9712.95 11702.22,9716.11 11627.78,9721.32 11020.78,9723.41 11542.82,9725.59 11902.78,9730.88 12477.78,9732.12 11058.32,9737.22 11098.32,9737.22 11138.32,9737.22 11178.32,9737.22 11218.32,9737.22 11258.32,9737.22 11298.32,9737.22 11338.32,9737.22 11378.32,9737.22 11418.32,9737.22 11458.32,9737.22 11837.22,9738.57 11977.22,9743.35 11510.37,9748.98 12552.22,9751.57 11762.78,9752.95 11702.22,9756.11 11627.78,9761.32 11902.78,9770.88 12477.78,9772.12 11837.22,9778.57 11977.22,9783.35 12552.22,9791.57 11762.78,9792.95 11702.22,9796.11 11627.78,9801.32 11902.78,9810.88 12477.78,9812.12 11837.22,9818.57 11977.22,9823.35 12552.22,9831.57 11762.78,9832.95 11702.22,9836.11 11627.78,9841.32 11902.78,9850.88 11511.94,9851.55 12477.78,9852.12 11472.5,9858.18 11837.22,9858.57 11032.76,9862.78 11072.76,9862.78 11112.76,9862.78 11152.76,9862.78 11192.76,9862.78 11232.76,9862.78 11272.76,9862.78 11312.76,9862.78 11352.76,9862.78 11392.76,9862.78 11432.76,9862.78 11977.22,9863.35 12552.22,9871.57 11762.78,9872.95 11543.69,9875.89 11702.22,9876.11 10995.21,9876.57 11627.78,9881.32 11902.78,9890.88 12477.78,9892.12 11837.22,9898.57 11977.22,9903.35 10966.93,9904.86 12552.22,9911.57 11762.78,9912.95 11547.53,9915.7 11702.22,9916.11 11627.78,9921.32 11902.78,9930.88 12477.78,9932.12 10938.65,9933.14 11041.76,9937.22 11081.76,9937.22 11121.76,9937.22 11161.76,9937.22 11201.76,9937.22 11241.76,9937.22 11281.76,9937.22 11321.76,9937.22 11361.76,9937.22 11401.76,9937.22 11441.76,9937.22 11837.22,9938.57 11977.22,9943.35 11520.76,9945.43 11480.77,9946.07 12552.22,9951.57 11762.78,9952.95 11702.22,9956.11 10910.36,9961.42 11627.78,9961.32 11012.53,9964.52 11902.78,9970.88 12477.78,9972.12 11837.22,9978.57 11977.22,9983.35 10882.08,9989.71 12552.22,9991.57 10984.24,9992.8 11762.78,9992.95 11702.22,9996.11 11627.78,10001.32 11902.78,10010.88 12477.78,10012.12 10853.79,10017.99 11837.22,10018.57 10955.96,10021.09 11977.22,10023.35 12552.22,10031.57 11762.78,10032.95 11702.22,10036.11 11627.78,10041.32 10825.51,10046.28 10927.67,10049.37 11501.01,10050.11 11902.78,10050.88 12477.78,10052.12 11837.22,10058.57 11063.07,10063.17 11103.07,10062.78 11143.07,10062.78 11183.07,10062.78 11223.07,10062.78 11263.07,10062.78 11303.07,10062.78 11343.07,10062.78 11383.07,10062.78 11423.07,10062.78 11463.07,10062.78 11977.22,10063.35 11537.39,10066.73 12552.22,10071.57 11762.78,10072.95 10797.22,10074.56 11702.22,10076.11 10899.39,10077.66 11627.78,10081.32 11028.71,10083.66 11902.78,10090.88 12477.78,10092.12 11837.22,10098.57 11977.22,10103.35 10770.53,10104.35 11549.72,10104.78 10871.11,10105.94 11000.43,10111.94 12552.22,10111.57 11762.78,10112.95 11702.22,10116.11 11627.78,10121.32 11902.78,10130.88 12475.32,10132.05 10842.82,10134.22 11093.23,10137.22 11133.23,10137.22 11173.23,10137.22 11213.23,10137.22 11253.23,10137.22 11293.23,10137.22 11333.23,10137.22 11373.23,10137.22 11413.23,10137.22 11453.23,10137.22 11837.22,10138.57 10972.15,10140.22 11530.24,10139.72 11977.22,10143.35 10766.33,10144.13 11491.39,10149.22 12551.31,10151.56 11762.78,10152.95 11702.22,10156.11 11059.27,10158.36 12447.04,10160.33 11627.78,10161.32 10943.86,10168.51 11902.78,10170.88 10840.76,10174.17 11837.22,10178.57 11977.22,10183.35 10766.33,10184.13 12528.33,10184.3 11030.99,10186.64 12418.75,10188.62 11762.78,10192.95 11702.22,10196.11 10915.58,10196.79 11627.78,10201.32 11902.78,10210.88 12500.05,10212.58 10840.76,10214.17 11002.71,10214.92 12390.47,10216.9 11837.22,10218.57 11977.22,10223.35 10766.33,10224.13 10897.78,10232.62 11762.78,10232.95 11702.22,10236.11 11627.78,10241.32 12471.76,10240.87 10974.42,10243.21 12362.19,10245.18 11499.21,10250.12 11902.78,10250.88 12087.01,10251.89 10840.76,10254.17 12126.59,10257.68 11837.22,10258.57 11261.26,10263.18 11301.26,10262.78 11341.26,10262.78 11381.26,10262.78 11421.26,10262.78 11461.26,10262.78 11977.22,10263.35 12166.27,10262.78 12206.27,10262.78 12246.27,10262.78 12286.27,10262.78 12326.27,10262.78 10766.33,10264.13 11536.11,10265.54 12443.48,10269.15 10897.78,10272.62 11762.78,10272.95 11702.22,10276.11 12055.71,10276.79 11627.78,10281.32 10972.22,10283.15 11227.6,10284.77 11902.78,10290.88 10840.76,10294.17 12415.2,10297.43 11837.22,10298.57 11549.95,10303.08 11977.22,10303.35 10766.33,10304.13 10897.78,10312.62 11199.31,10313.06 11762.78,10312.95 11702.22,10316.11 12052.88,10316.69 11627.78,10321.32 10972.22,10323.15 12386.91,10325.72 11902.78,10330.88 10840.76,10334.17 11295.04,10337.22 11335.04,10337.22 11375.04,10337.22 11415.04,10337.22 11455.04,10337.22 12148.6,10337.22 12188.6,10337.22 12228.6,10337.22 12268.6,10337.22 12308.6,10337.22 12348.6,10337.22 11531.64,10338.64 11837.22,10338.57 11171.03,10341.34 11977.22,10343.35 10766.33,10344.13 11493.13,10349.45 12110.37,10348.98 10897.78,10352.62 11762.78,10352.95 11702.22,10356.11 11260.41,10357.22 11627.78,10361.32 10972.22,10363.15 11142.74,10369.63 11902.78,10370.88 10840.76,10374.17 11837.22,10378.57 11977.22,10383.35 10766.33,10384.13 11232.12,10385.51 10897.78,10392.62 11762.78,10392.95 11702.22,10396.11 11114.46,10397.91 11627.78,10401.32 10972.22,10403.15 11902.78,10410.88 10840.76,10414.17 11203.84,10413.79 11837.22,10418.57 11977.22,10423.35 10766.33,10424.13 11086.17,10426.19 10897.78,10432.62 11762.78,10432.95 11702.22,10436.11 11627.78,10441.32 11175.55,10442.08 10972.22,10443.15 11904.63,10450.83 12004.88,10452.24 12082.32,10453.29 10840.76,10454.17 11057.89,10454.48 11518.65,10453.69 11478.67,10454.8 12122.27,10455.19 11837.22,10458.57 11319.47,10462.78 11359.47,10462.78 11399.47,10462.78 11439.47,10462.78 12043.46,10462.78 10766.33,10464.13 11279.64,10466.5 11147.27,10470.36 10897.78,10472.62 11762.78,10472.95 11702.22,10476.11 11627.78,10481.32 11546.67,10482.24 11929.52,10482.15 10972.22,10483.15 12147.89,10485.91 11034.06,10486.6 11249.53,10492.83 10840.76,10494.17 11118.99,10498.64 11837.22,10498.57 10766.33,10504.13 11957.8,10510.43 10897.78,10512.62 11762.78,10512.95 11702.22,10516.11 11221.25,10521.12 11627.78,10521.32 11544.84,10522.19 10972.22,10523.15 12142.82,10525.59 11032.78,10526.58 10840.76,10534.17 11852.97,10535.34 11989.1,10535.34 11107.22,10536.87 11314.89,10537.22 11354.89,10537.22 11394.89,10537.22 11434.89,10537.22 12029.06,10537.22 12069.01,10539.14 11474.49,10542.85 10766.33,10544.13 11514.17,10547.87 11192.97,10549.4 12110.37,10548.98 10897.78,10552.62 11767.46,10552.67 11702.22,10556.11 11627.78,10561.32 10972.22,10563.15 11284.45,10563.18 11881.25,10563.62 11032.78,10566.58 10840.76,10574.17 11107.22,10576.87 11166.58,10579.46 11794.51,10582.14 10766.33,10584.13 11256.17,10591.46 11909.54,10591.91 10897.78,10592.62 11702.22,10596.11 11627.78,10601.32 10972.22,10603.15 11032.78,10606.58 11822.79,10610.42 10840.76,10614.17 11107.22,10616.87 11162.78,10619.28 11937.82,10620.19 10766.33,10624.13 11237.22,10626.68 10897.78,10632.62 11702.22,10636.11 11851.08,10638.71 11627.78,10641.32 10972.22,10643.15 11032.78,10646.58 11966.11,10648.48 11510.76,10651.15 12082.32,10653.29 10840.76,10654.17 12122.27,10655.19 11107.22,10656.87 11162.78,10659.28 11471.52,10658.93 11391.71,10663.18 11431.71,10662.78 12003.46,10662.78 12043.46,10662.78 10766.33,10664.13 11237.22,10666.68 11879.36,10666.99 11719.71,10672.08 10897.78,10672.62 11543.01,10674.8 11629.81,10681.27 10972.22,10683.15 11357.87,10684.5 12147.89,10685.91 11032.78,10686.58 10840.76,10694.17 11907.65,10695.28 11107.22,10696.87 11162.78,10699.28 11748,10700.36 10766.33,10704.13 11237.22,10706.68 11654.84,10712.47 10897.78,10712.62 11329.58,10712.79 11547.81,10714.52 10972.22,10723.15 11935.93,10723.56 12142.82,10725.59 11032.78,10726.58 11776.28,10728.65 10840.76,10734.17 11107.22,10736.87 11443.01,10737.22 11973.53,10737.22 12013.53,10737.22 12053.53,10737.22 11162.78,10739.28 11301.58,10741.35 11683.12,10740.75 10766.33,10744.13 11403.59,10744.04 11521.87,10744.97 11237.22,10746.68 11481.9,10746.54 12110.37,10748.98 10897.78,10752.62 11804.56,10756.93 10972.22,10763.15 11032.78,10766.58 11711.41,10769.04 11375.31,10772.32 10840.76,10774.17 11107.22,10776.87 11162.78,10779.28 11292.78,10780.37 10766.33,10784.13 11832.85,10785.22 11237.22,10786.68 10897.78,10792.62 11739.69,10797.32 10972.22,10803.15 11032.78,10806.58 11367.22,10811.5 10840.76,10814.17 11861.13,10813.5 11107.22,10816.87 11162.78,10819.28 11292.78,10820.37 10766.33,10824.13 11767.97,10825.6 11237.22,10826.68 10897.78,10832.62 11889.42,10841.79 10972.22,10843.15 11032.78,10846.58 11367.22,10851.5 11486.88,10851.92 12082.32,10853.29 10840.76,10854.17 11796.26,10853.89 12122.27,10855.19 11107.22,10856.87 11526.47,10857.62 11162.78,10859.28 11292.78,10860.37 11566.14,10862.78 11923.46,10862.78 11963.46,10862.78 12003.46,10862.78 12043.46,10862.78 10766.33,10864.13 11606.09,10864.74 11237.22,10866.68 10897.78,10872.62 11455.64,10876.9 11824.54,10882.17 10972.22,10883.15 12147.89,10885.91 11032.78,10886.58 11637.34,10889.71 11367.22,10891.5 10840.76,10894.17 11107.22,10896.87 11162.78,10899.28 11292.78,10900.37 10766.33,10904.13 11237.22,10906.68 11852.83,10910.46 10897.78,10912.62 11452.93,10916.8 11665.62,10917.99 10972.22,10923.15 12142.82,10925.59 11032.78,10926.58 11367.22,10931.5 10840.76,10934.17 11884.13,10935.36 11107.22,10936.87 11559.48,10937.22 11924.09,10937.22 11964.09,10937.22 12004.09,10937.22 12044.09,10937.22 11162.78,10939.28 11292.78,10940.37 10766.33,10944.13 11480.37,10945.9 11520.37,10945.59 11237.22,10946.68 11693.63,10946.55 12110.37,10948.98 10897.78,10952.62 11595.97,10953.6 10972.22,10963.15 11032.78,10966.58 11367.22,10971.5 10840.76,10974.17 11107.22,10976.87 11162.78,10979.28 11292.78,10980.37 11624.26,10981.89 10766.33,10984.13 11702.22,10985.62 11237.22,10986.68 10897.78,10992.62 10972.22,11003.15 11032.78,11006.58 11367.22,11011.5 10840.76,11014.17 11107.22,11016.87 11162.78,11019.28 11292.78,11020.37 11627.78,11021.73 10766.33,11024.13 11702.22,11025.62 11237.22,11026.68 10897.78,11032.62 10972.22,11043.15 11032.78,11046.58 11367.22,11051.5 10840.76,11054.17 11107.22,11056.87 11162.78,11059.28 11292.78,11060.37 11627.78,11061.73 10766.33,11064.13 11702.22,11065.62 11237.22,11066.68 10897.78,11072.62 10972.22,11083.15 10445,11085 11032.78,11086.58 11367.22,11091.5 10840.76,11094.17 11107.22,11096.87 11162.78,11099.28 10725,11100 11292.78,11100.37 11627.78,11101.73 10766.33,11104.13 11702.22,11105.62 11237.22,11106.68 10897.78,11112.62 10972.22,11123.15 11032.78,11126.58 11367.22,11131.5 10840.76,11134.17 10495,11135 11107.22,11136.87 11162.78,11139.28 11292.78,11140.37 11627.78,11141.73 11702.22,11145.62 11237.22,11146.68 10897.78,11152.62 10972.22,11163.15 11032.78,11166.58 11367.22,11171.5 10840.76,11174.17 11107.22,11176.87 11162.78,11179.28 11292.78,11180.37 11627.78,11181.73 10766.33,11184.13 11702.22,11185.62 11237.22,11186.68 10897.78,11192.62 10725,11200 10972.22,11203.15 11032.78,11206.58 10559.7,11207.86 10599.69,11208.24 10479.71,11209.08 10519.71,11209.08 11367.22,11211.5 10840.76,11214.17 11107.22,11216.87 11162.78,11219.28 11292.78,11220.37 10441.81,11221.86 11627.78,11221.73 10766.33,11224.13 11702.22,11225.62 11237.22,11226.68 10897.78,11232.62 10972.22,11243.15 11032.78,11246.58 10413.53,11250.14 11367.22,11251.5 10840.76,11254.17 11107.22,11256.87 11162.78,11259.28 11292.78,11260.37 11627.78,11261.73 10766.33,11264.13 11702.22,11265.62 11237.22,11266.68 10897.78,11272.62 10972.22,11283.15 10518.08,11283.52 10558.07,11284.37 10598.03,11286.18 11032.78,11286.58 10478.66,11290.27 11367.22,11291.5 10840.76,11294.17 11107.22,11296.87 11162.78,11299.28 11292.78,11300.37 11627.78,11301.73 10766.33,11304.13 10356.64,11306.39 11702.22,11305.62 11237.22,11306.68 10897.78,11312.62 10450.37,11318.56 10972.22,11323.15 10321.18,11324.89 11032.78,11326.58 11367.22,11331.5 10840.76,11334.17 11107.22,11336.87 11162.78,11339.28 11292.78,11340.37 11627.78,11341.73 10766.33,11344.13 11702.22,11345.62 10422.09,11346.84 11237.22,11346.68 10897.78,11352.62 10310.59,11363.47 10972.22,11363.15 11032.78,11366.58 11367.22,11371.5 10840.76,11374.17 11107.22,11376.87 11162.78,11379.28 11292.78,11380.37 10402.82,11381.89 11627.78,11381.73 10766.33,11384.13 11702.22,11385.62 11237.22,11386.68 10591.89,11390.04 10897.78,11392.62 10668.11,11402.61 10972.22,11403.15 10362.15,11406.38 11032.78,11406.58 10322.19,11408.25 10401.88,11410.97 11367.22,11411.5 10840.76,11414.17 11107.22,11416.87 10441.05,11419.08 10481.05,11419.08 10521.05,11419.08 11162.78,11419.28 10561.03,11420.33 11292.78,11420.37 10751.21,11421.16 11627.78,11421.73 11702.22,11425.62 11237.22,11426.68 10592.78,11430.03 10897.78,11432.62 10676.85,11441.64 10716.85,11441.64 10972.22,11443.15 10310.08,11446.37 11032.78,11446.58 10826.2,11451.43 11367.22,11451.5 11107.22,11456.87 11162.78,11459.28 11292.78,11460.37 11627.78,11461.73 11702.22,11465.62 11237.22,11466.68 10897.78,11472.62 10797.92,11479.71 10972.22,11483.15 10310.19,11486.37 11032.78,11486.58 11367.22,11491.5 10422.85,11493.52 10462.85,11493.52 10502.85,11493.52 11107.22,11496.87 11162.78,11499.28 11292.78,11500.37 11627.78,11501.73 10541.02,11505.47 10344.92,11506.22 10384.92,11506.22 11702.22,11505.62 11237.22,11506.68 10769.36,11507.72 10897.78,11512.62 10598.43,11515.42 10650.24,11516.07 10690.24,11516.07 10730.24,11516.07 10972.22,11523.15 11032.78,11526.58 11367.22,11531.5 11107.22,11536.87 11162.78,11539.28 11292.78,11540.37 11627.78,11541.73 11702.22,11545.62 11237.22,11546.68 10897.78,11552.62 10972.22,11563.15 11032.78,11566.58 11367.22,11571.5 11107.22,11576.87 11162.78,11579.28 11292.78,11580.37 11627.78,11581.73 11702.22,11585.62 11237.22,11586.68 10897.78,11592.62 10972.22,11603.15 11032.78,11606.58 11367.22,11611.5 11107.22,11616.87 11162.78,11619.28 11292.78,11620.37 11627.78,11621.73 11702.22,11625.62 11237.22,11626.68 10897.78,11632.62 10972.22,11643.15 11032.78,11646.58 11367.22,11651.5 11107.22,11656.87 11162.78,11659.28 11292.78,11660.37 11627.78,11661.73 11702.22,11665.62 11237.22,11666.68 10897.78,11672.62 10972.22,11683.15 11032.78,11686.58 11367.22,11691.5 11107.22,11696.87 11162.78,11699.28 11292.78,11700.37 11627.78,11701.73 11702.22,11705.62 11237.22,11706.68 10897.78,11712.62 10972.22,11723.15 11032.78,11726.58 11367.22,11731.5 10445,11735 11107.22,11736.87 11162.78,11739.28 10750,11740 11292.78,11740.37 11627.78,11741.73 11702.22,11745.62 11237.22,11746.68 10897.78,11752.62 1720,11755 10972.22,11763.15 11032.78,11766.58 11367.22,11771.5 11107.22,11776.87 11162.78,11779.28 11292.78,11780.37 11627.78,11781.73 10495,11785 11702.22,11785.62 11237.22,11786.68 10897.78,11792.62 10805,11795 1670,11800 1770,11800 10972.22,11803.15 11032.78,11806.58 11367.22,11811.5 11107.22,11816.87 11162.78,11819.28 11292.78,11820.37 11627.78,11821.73 11702.22,11825.62 11237.22,11826.68 10897.78,11832.62 10972.22,11843.15 10597.91,11845.24 10745,11845 10557.93,11846.44 11032.78,11846.58 10478.02,11849.08 10518.02,11849.08 11367.22,11851.5 11107.22,11856.87 11162.78,11859.28 10439.4,11859.51 11292.78,11860.37 11627.78,11861.73 11702.22,11865.62 11237.22,11866.68 10897.78,11872.62 10972.22,11883.15 11032.78,11886.58 10411,11887.67 11367.22,11891.5 11107.22,11896.87 11162.78,11899.28 1565,11900 1675,11900 11292.78,11900.37 11627.78,11901.73 11702.22,11905.62 11237.22,11906.68 10897.78,11912.62 10598.62,11923.19 10972.22,11923.15 10518.62,11923.52 10558.62,11923.52 1300,11925 1400,11925 10478.66,11925.27 11032.78,11926.58 11367.22,11931.5 11107.22,11936.87 11162.78,11939.28 11292.78,11940.37 10352.32,11941.96 11627.78,11941.73 11702.22,11945.62 11237.22,11946.68 10897.78,11952.62 10450.37,11953.56 10318.52,11963.36 10972.22,11963.15 11032.78,11966.58 1350,11970 11367.22,11971.5 11107.22,11976.87 11162.78,11979.28 11292.78,11980.37 10422.09,11981.84 11627.78,11981.73 11702.22,11985.62 11237.22,11986.68 10897.78,11992.62 10311.37,12002.71 10972.22,12003.15 8015,12005 8125,12005 11032.78,12006.58 10663.79,12008.72 11367.22,12011.5 10402.82,12016.89 11107.22,12016.87 11162.78,12019.28 11292.78,12020.37 11627.78,12021.73 10591.89,12022.6 11702.22,12025.62 11237.22,12026.68 10879.29,12028.08 10362.15,12041.38 10322.19,12043.25 10967.43,12042.86 10401.88,12045.97 11032.78,12046.58 10668.11,12048.49 11367.22,12051.5 10441.05,12054.08 10481.05,12054.08 10521.05,12054.08 10561.03,12055.33 10851,12056.37 11107.22,12056.87 11162.78,12059.28 11292.78,12060.37 11627.78,12061.73 10592.78,12062.59 11702.22,12065.62 11237.22,12066.68 10940.34,12072.29 7925,12075 10696.52,12076.64 10736.52,12076.64 10776.52,12076.64 10816.52,12076.64 10310.08,12081.37 11032.78,12086.58 11367.22,12091.5 11107.22,12096.87 11162.78,12099.28 11292.78,12100.37 10912.06,12100.57 11627.78,12101.73 11702.22,12105.62 11237.22,12106.68 7925,12115 10310.19,12121.37 11032.78,12126.58 10422.85,12128.52 10462.85,12128.52 10502.85,12128.52 10883.77,12128.86 8310,12130 11367.22,12131.5 11107.22,12136.87 11162.78,12139.28 10541.02,12140.47 11292.78,12140.37 10344.92,12141.22 10384.92,12141.22 11627.78,12141.73 11702.22,12145.62 11237.22,12146.68 10598.43,12150.42 10650.24,12151.07 10690.24,12151.07 10730.24,12151.07 10770.24,12151.07 10810.24,12151.07 10850.24,12150.66 11032.78,12166.58 11367.22,12171.5 11107.22,12176.87 11162.78,12179.28 11292.78,12180.37 11627.78,12181.73 8365,12185 11702.22,12185.62 11237.22,12186.68 11032.78,12206.58 11367.22,12211.5 11107.22,12216.87 11162.78,12219.28 11292.78,12220.37 11627.78,12221.73 11702.22,12225.62 11237.22,12226.68 8310,12240 11032.78,12246.58 11367.22,12251.5 11107.22,12256.87 11162.78,12259.28 11292.78,12260.37 11627.78,12261.73 11702.22,12265.62 11237.22,12266.68 11032.78,12286.58 11367.22,12291.5 11107.22,12296.87 11162.78,12299.28 11292.78,12300.37 11627.78,12301.73 11702.22,12305.62 11237.22,12306.68 11032.78,12326.58 11367.22,12331.5 11107.22,12336.87 11162.78,12339.28 11292.78,12340.37 11627.78,12341.73 11702.22,12345.62 11237.22,12346.68 11032.78,12366.58 11367.22,12371.5 11107.22,12376.87 11162.78,12379.28 11292.78,12380.37